# Altium PCB FOC_DRV8323.PcbDoc
Units mil, origin at the board's own origin, x right, y up, seen from the top; angles counter-clockwise.
Board outline 2322.83 x 1417.32 mil, 2 copper layers (Top Layer, Bottom Layer); 37 components, 36 nets, 170 pads, 338 vias.
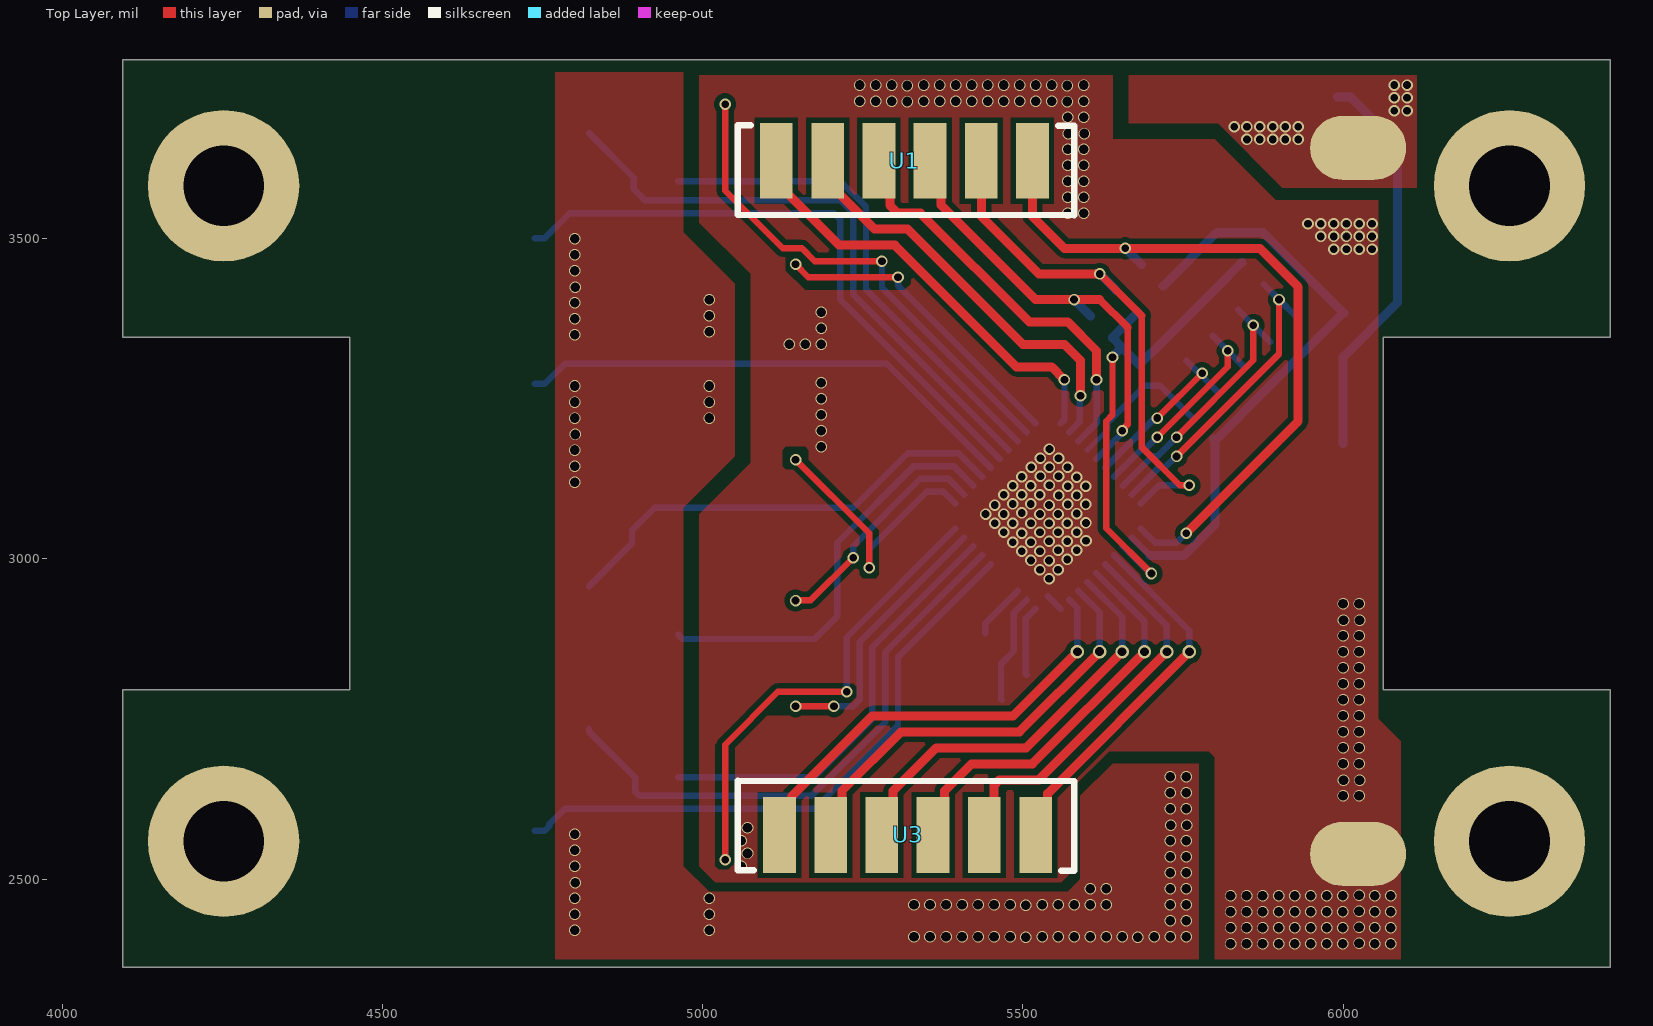
[diagram p0: Top Layer view]
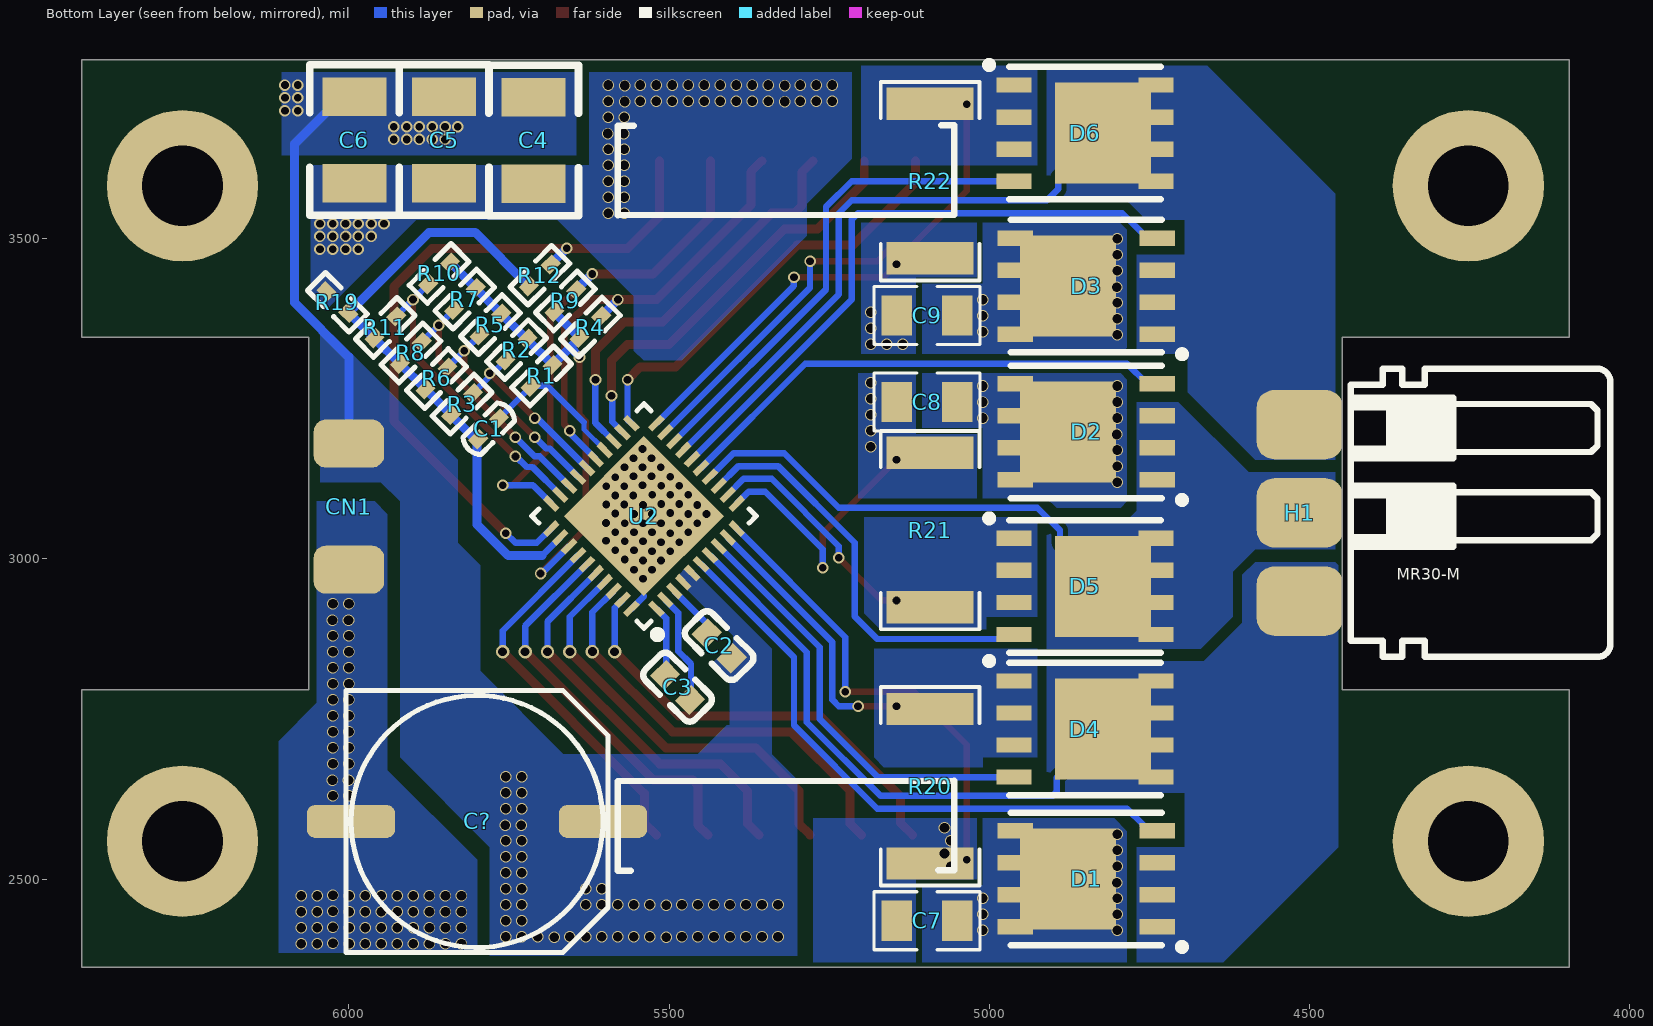
[diagram p1: Bottom Layer view, seen from below]
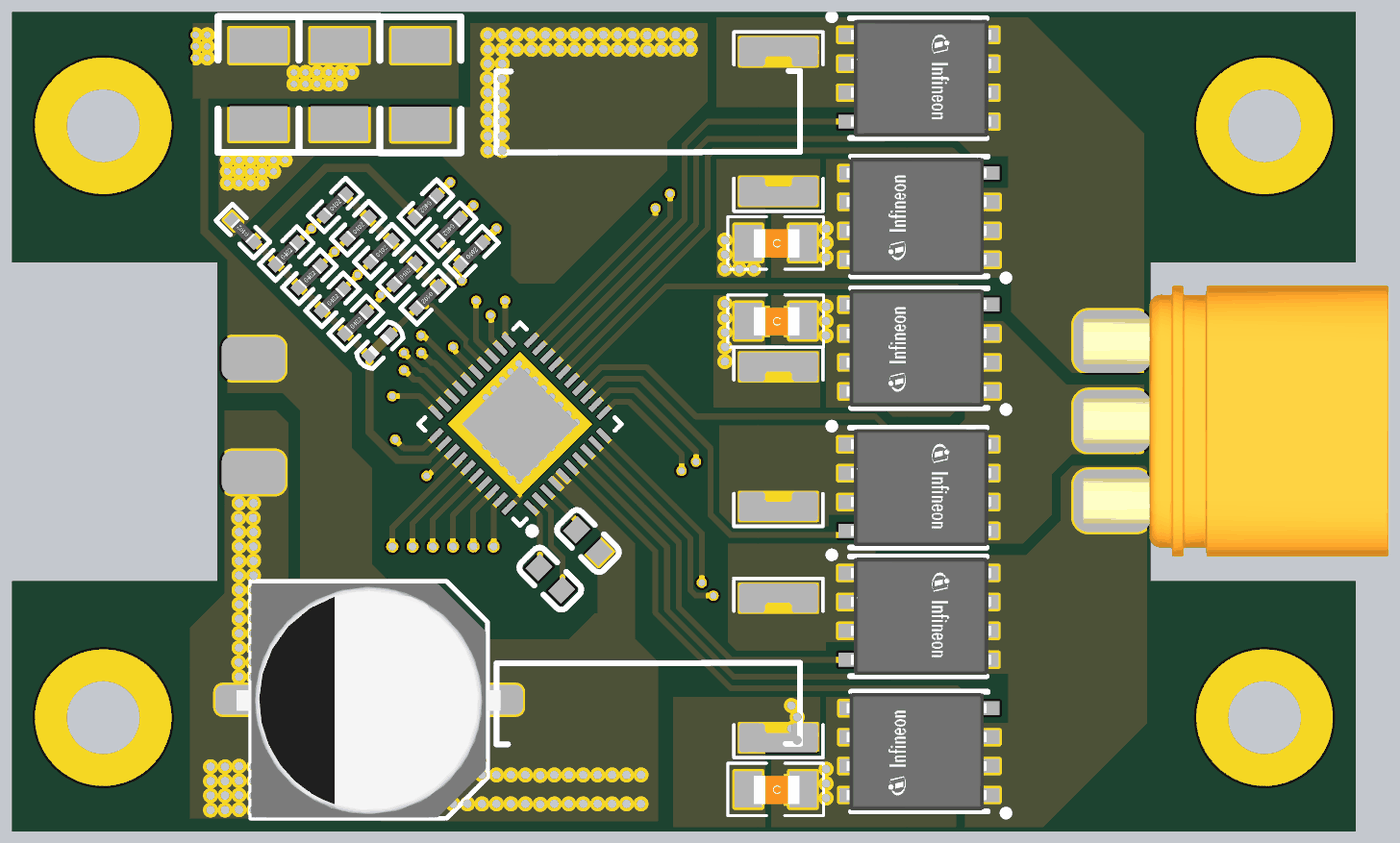
[diagram p2: 3D render of the assembled board from below, using the file's embedded part models]

## Layer stack, top to bottom
Top Solder: solder mask 0.4, Solder Resist, Dk 3.5
Top Layer: signal copper 1.4
Dielectric 1: dielectric 12.6, FR-4, Dk 4.8
Bottom Layer: signal copper 1.4
Bottom Solder: solder mask 0.4, Solder Resist, Dk 3.5

## Board outline
4094.49,2362.2 4094.49,2795.28 4448.82,2795.28 4448.82,3346.46 4094.49,3346.46 4094.49,3779.53 6417.32,3779.53 6417.32,3346.46 6062.99,3346.46 6062.99,2795.28 6417.32,2795.28 6417.32,2362.2

## Design rules (kind name [scope] priority, off if disabled: settings)
Clearance [All] p1: gap=6 ignorepadtopadclearanceinfootprint=FALSE except(0: Arc-Hole Track-Hole SMDPad-Hole THPad-Hole Via-Hole Fill-Hole Poly-Hole Region-Hole Text-Hole; 8: Arc-Fill Arc-Poly Arc-Region Track-Fill Track-Poly Track-Region SMDPad-Fill SMDPad-Poly SMDPad-Region THPad-Fill THPad-Poly THPad-Region Via-Fill Via-Poly Via-Region Fill-Fill Fill-Poly Fill-Region Poly-Poly Poly-Region Region-Region)
HoleToHoleClearance [All] p1: gap=4 allowstackedmicrovias=TRUE
MinimumSolderMaskSliver [All] p1: minsoldermaskwidth=0
PlaneClearance [All] p1: clearance=8
PlaneConnect [All] p1: planeconnectstyle=Direct reliefexpansion=20 reliefentries=4 reliefconductorwidth=10 reliefairgap=10
PolygonConnect [All] p1: connectstyle=Direct reliefconductorwidth=10 reliefentries=4 polygonreliefangle="90 Angle" airgapwidth=10
RoutingVias [All] p1: holewidth=12 width=18 viastyle="Through Hole" minholewidth=10 minwidth=18 maxholewidth=28 maxwidth=50
SilkToSilkClearance [All] p1: silktosilkclearance=0
SilkToSolderMaskClearance [IsPad] p1: minsilkscreentomaskgap=0 clearancetoexposedcopper=TRUE
SolderMaskExpansion [All] p1: expansion=4 istentingtop=FALSE
Width [All] p1: maxlimit=14 minlimit=6 preferedwidth=10
24 further rules are at their usual default settings.

## Components (designator, comment, footprint, x,y, rotation, side; value= is the part's Value field where it differs from the comment)
C1 "100nF" c0402 5766.21,3218.79 r315 bottom
C2 "1uF" C0603 5919.03,3237.21 r225 bottom
C3 "47nF" C0603 5984.03,3172.21 r225 bottom
C4 "10uF" 1210 5711.52,3586.09 r90 bottom
C5 "10uF" 1210 5851.44,3586.56 r90 bottom
C6 "10uF" 1210 5991.44,3586.56 r90 bottom
C7 "10uF" C0805 5097.24,2435 r180 bottom
C8 "10uF" C0805 5097.24,3245 r180 bottom
C9 "10uF" C0805 5097.24,3380 r180 bottom
C? "铝电解电容" C10X10 5800,2590 r0 bottom value=47uF
CN1 "XT30_1" XT30卧式焊盘 6000,3081.57 r0 bottom
D1 "NTMFS5C670" pg-tdson-8 4957.83,2450.34 r90 bottom
D2 "NTMFS5C670" pg-tdson-8 4957.83,3148.34 r90 bottom
D3 "NTMFS5C670" pg-tdson-8 4957.83,3376.01 r90 bottom
D4 "NTMFS5C670" pg-tdson-8 4741.46,2784.33 r270 bottom
D5 "NTMFS5C670" pg-tdson-8 4741.46,3007 r270 bottom
D6 "NTMFS5C670" pg-tdson-8 4741.46,3715 r270 bottom
H1 "MR30-M" MR30 4515,3071.89 r90 bottom
R1 "0" R0402 5682.13,3302.87 r315 bottom
R2 "0" R0402 5755.3,3309.7 r135 bottom
R3 "0" R0402 5840.3,3224.7 r135 bottom
R4 "200k" R0402 5640,3345 r135 bottom
R5 "0" R0402 5796.21,3348.79 r135 bottom
R6 "0" R0402 5880.3,3264.7 r135 bottom
R7 "0" R0402 5836.21,3388.79 r135 bottom
R8 "0" R0402 5920.3,3304.7 r135 bottom
R9 "0" R0402 5645,3420 r315 bottom
R10 "0" R0402 5876.21,3428.79 r135 bottom
R11 "0" R0402 5960.3,3344.7 r135 bottom
R12 "200k" R0402 5685,3460 r315 bottom
R19 "0" R0402 6001.21,3383.79 r45 bottom
R20 "0.004" R2512 5092.39,2645 r270 bottom
R21 "0.004" R2512 5092.39,3045 r90 bottom
R22 "0.004" R2512 5092.39,3590 r270 bottom
U1 "邮票孔6P加大" PCBComponent_1___pad 5317.48,3607.05 r90 top locked
U2 "DRV8323HRTAR" QFN-40_L6.0-W6.0-P0.50-BL-EP4.5 5531.21,3058.79 r135 bottom
U3 "邮票孔6P加大" PCBComponent_1___pad 5317.48,2583.43 r270 top locked

## Footprints (in the part's own frame and the unit in brackets; to place one, negate y for a bottom-side part, rotate by r counter-clockwise, add the part's x,y. Pads: shape width x height; smd on the part's side, far side on the other; paste and mask are expansions set on the pad)
1210 [mil]
  rect 60x100 smd: 1(0,0) 2(135,0)
  silkscreen extent -50,-70 185,70, body extent 4,-49 130,49, height 30
C10X10 [mm]
  rrect50% 3.5x1.3 smd: 1(-5,0) 2(5,0)
  silkscreen extent -5.2,-5.2 5.2,5.2, body extent -5.77,-5.12 5.83,5.18, height 10.21
c0402 [mil]
  rect 25x20 smd: 1(-1,0) 2(45,0)
  silkscreen extent -23,-19 67,20, body extent 2,-10 42,10, height 20
C0603 [mm]
  rect 0.8x0.9 smd: 1(14.929,2.234) 2(16.33,2.234)
  silkscreen extent 14.22,1.52 17.02,2.95, body extent 14.82,1.84 16.42,2.64, height 0.78
C0805 [mm]
  rect 1.2x1.6 smd: 1(-1.2,0) 2(1.2,0)
  silkscreen extent -2.1,-1.15 2.1,1.15, body extent -1.46,-0.72 1.54,0.68, height 0.93
MR30 [mm]
  rrect50% 2.75x3.429 smd: 1(3.5,0) 2(0,0) 3(-3.5,0)
  silkscreen extent -5.72,-12.31 5.72,-2.02, body extent -5.95,-12.12 5.95,1.28, height 2.45
PCBComponent_1___pad [mm]
  rect 3x1.3 smd paste+0 mask+0.102: 1(0.37,5.143) 2(0.37,3.103) 3(0.37,1.073) 4(0.37,-0.957) 5(0.37,-2.987) 6(0.37,-5.017)
  silkscreen extent -1.79,-6.67 1.79,6.67
pg-tdson-8 [mm]
  rect 0.61x1.4 smd: 1(3.175,-5.588) 2(-0.635,0.044) 2(0.635,0.044) 2(1.905,0.044) 2(3.175,0.044) 3(-0.635,-5.588) 3(0.635,-5.588) 3(1.905,-5.588)
  rect 4x3.81 smd: 2(1.27,-2.056)
  silkscreen extent -1.55,-6.7 3.9,0.23, body extent -1.43,-5.73 3.97,0.42, height 1.01
QFN-40_L6.0-W6.0-P0.50-BL-EP4.5 [mm]
  rect 0.25x0.7 smd paste-100 mask+0.051: 1(-2.25,-2.659) 2(-1.75,-2.659) 3(-1.25,-2.659) 4(-0.75,-2.659) 5(-0.25,-2.659) 6(0.25,-2.659) 7(0.75,-2.659) 8(1.25,-2.659) 9(1.75,-2.659) 10(2.25,-2.659) 21(2.25,3.241) 22(1.75,3.241) 23(1.25,3.241) 24(0.75,3.241) 25(0.25,3.241) 26(-0.25,3.241) 27(-0.75,3.241) 28(-1.25,3.241) 29(-1.75,3.241) 30(-2.25,3.241)
  rect 0.7x0.25 smd paste-100 mask+0.051: 11(2.95,-1.958) 12(2.95,-1.459) 13(2.95,-0.958) 14(2.95,-0.459) 15(2.95,0.042) 16(2.95,0.541) 17(2.95,1.042) 18(2.95,1.541) 19(2.95,2.041) 20(2.95,2.541) 31(-2.95,2.541) 32(-2.95,2.041) 33(-2.95,1.541) 34(-2.95,1.042) 35(-2.95,0.541) 36(-2.95,0.042) 37(-2.95,-0.459) 38(-2.95,-0.958) 39(-2.95,-1.459) 40(-2.95,-1.958)
  rect 4.5x4.5 smd paste-100 mask+0.051: 41(0,0.292)
  silkscreen extent -3.15,-3.56 3.15,3.44
R0402 [mil] "1/16W"
  rect 25x20 smd: 1(0,0) 2(48.2,0)
  silkscreen extent -22,-20 70,20, body extent 5,-10 44,10, height 14
R2512 [mil]
  rect 50.49x136.06 smd paste-3937.01 mask+2: 1(120.72,0) 2(-120.72,0)
  silkscreen extent -155,-77 155,77
XT30卧式焊盘 [mil]
  rrect50% 110x75 smd: 1(0,98.43) 2(0,-98.43)

## Part data
C1 C2 C3: library part CC0201JRX7R9BB101
C4 C5 C6 C7 C8 C9: library part 1210贴片电容, "1210贴片电容"
C?: library part "SMD 10x10 铝电解电容", "SMD 10x10 铝电解电容", LatestRevisionDate=29-May-2009, LatestRevisionNote="IPC-7351 Footprint Added.", PackageDescription="Chip Capacitor", PackageReference=C0805, Published=8-Jun-2000, Publisher="Altium Limited"
D1 D2 D3 D4 D5 D6: "N沟道MOS管", ComponentLink1Description="Manufacturer Link", ComponentLink1URL=http://www.irf.com/, DatasheetVersion=PD-9.814, LatestRevisionDate=17-Jul-2002, LatestRevisionNote="Re-released for DXP Platform.", Note="Pin 2 is electrically connected to pin 4.", PackageDescription="TO, Thru-Hole, Vertical, Heatsink Mounted; 3 In-Line Leads; Pitch 2.54 mm", PackageReference=TO-220AB, PackageVersion=Feb-1997, Published=8-Jun-2000, Publisher="Altium Limited"
H1: BOM_Manufacturer=AMASS(艾迈斯), BOM_Manufacturer Part=MR30-M, BOM_Supplier=LCSC, BOM_Supplier Part=C99873, Contributor=LCEDA_Lib, spicePre=H, spiceSymbolName=HDR-F-2.54_1x3
R1 R2 R3 R4 R5 R6 R7 R8 R9 R10 R11 R12 R19: library part 2.2R, BOM_Manufacturer=UniOhm, BOM_Manufacturer Part=0603WAJ022JT5E, BOM_Supplier=LCSC, BOM_Supplier Part=C25226, nameAlias=Value(Ω), spicePre=R, spiceSymbolName=Res_0603(1/10W)_EU
R20 R21 R22: library part 0.0005, BOM_Manufacturer=RALEC(旺诠), BOM_Manufacturer Part=LR2512-23R0005J4, BOM_Supplier=LCSC, BOM_Supplier Part=C2681067, Contributor=LCSC, nameAlias="Resistance (Ohms)", spicePre=R, spiceSymbolName=LCSR2512FL500K9L

## Free pads (board coordinates)
  oval 150x100 smd: 3(6023.62,2539.37) 3(6023.62,3641.73)
  round 236.22 hole 125.98: 4(4251.97,2559.06) 4(4251.97,3582.68) 4(6259.84,2559.06) 4(6259.84,3582.68)

## Via types
v1: diameter 18, hole 15, Top Layer to Bottom Layer, 211 vias
v2: diameter 18, hole 12, Top Layer to Bottom Layer, 121 vias
v3: diameter 21, hole 14, Top Layer to Bottom Layer, 6 vias

## Nets (pads, with @x,y where several pads share a name; then routed paths per layer and width w, separated by ;. In a path a pad name is that pad's centre, name@x,y a point inside that pad or via, vN(x,y) a via of type N, cw(c..) or ccw(c..) an arc to the next point about the centre after c; other vN are vias at no path point)
AGND: C1.2 R3.1 R6.1 R8.1 R11.1 R12.2 R19.1 U2.32 | length 949.7
  Bottom Layer w10: U2.32 5698.67,3005
  Bottom Layer w14: 5698.67,3005 5751.11,3005 5799.8,3053.69 5799.8,3185.2 C1.2 5798.17,3186.83 5802.42,3186.83 R6.1 R8.1 R11.1 5999.38,3383.79 R19.1 5875,3510 5803.16,3510 R12.2
CAL: R12.1 U1.6 U2.31 | length 1126.4
  Top Layer w14: U1.6 5514.99,3535.01 5565,3485 v2(5660,3485) 5870,3485 5930,3425 5930,3215 v2(5755,3040)
  Bottom Layer w10: U2.31 5706.5,3025 5740,3025 v2(5755,3040)
  Bottom Layer w14: v2(5660,3485) R12.1
DVDD: R1.1 R2.2 R4.1 R5.2 R7.2 R9.2 R10.2 U2.33 | length 796.9
  Top Layer w10: v2(5640,3315) 5640,3225 5630,3215 5630,3048.06 v2(5700.86,2977.2)
  Bottom Layer w10: U2.33 5656.36,3019.57 5698.73,2977.2 v2(5700.86,2977.2)
  Bottom Layer w14: v2@5640,3316.08 5654.46,3330.54 ; R9.2 5679.08,3385 5640,3345.92 R4.1 5654.46,3330.54 ; R10.2 R7.2 R5.2 5722.13,3342.87 R1.1 5654.46,3330.54
ENABLE: R9.1 U1.5 U2.30 | length 828.8
  Top Layer w10: 5685.38,3379.62 5685.38,3174.62 5745,3115 v2(5760,3115)
  Top Layer w12: v2(5620,3445) 5685.38,3379.62
  Top Layer w14: U1.5 5435.07,3534.93 5525,3445 v2(5620,3445)
  Bottom Layer w10: U2.30 5712.7,3115 v2(5760,3115)
  Bottom Layer w14: v2(5620,3445) R9.1
M0_AH: U2.34 U3.1 | length 585
  Top Layer w14: U3.1 5538.56,2587.45 5538.56,2633.56 v3(5760,2855)
  Bottom Layer w10: U2.34 5760,2887.99 v3(5760,2855)
M0_AL: U2.35 U3.2 | length 617.3
  Top Layer w14: U3.2 5455,2584.21 5455,2646.8 5463.2,2655 5525,2655 v3(5725,2855)
  Bottom Layer w10: U2.35 5725,2895.14 v3(5725,2855)
M0_BH: U2.36 U3.3 | length 632.7
  Top Layer w14: U3.3 5377.47,2586.6 5377.47,2637.47 5420,2680 5515,2680 v3(5690,2855)
  Bottom Layer w10: U2.36 5690,2902.31 v3(5690,2855)
M0_BL: U2.37 U3.4 | length 655.1
  Top Layer w14: U3.4 5297.38,2586.43 5297.38,2637.64 5364.74,2705 5505,2705 v3(5655,2855)
  Bottom Layer w10: U2.37 5655,2909.47 v3(5655,2855)
M0_CH: U2.38 U3.5 | length 677.1
  Top Layer w14: U3.5 5217.55,2586.52 5217.55,2637.55 5310,2730 5494.59,2730 v3(5619.8,2855.2)
  Bottom Layer w10: U2.38 5620,2916.63 5620,2855.41 v3(5619.8,2855.2)
M0_CL: U2.39 U3.6 | length 693.8
  Top Layer w14: U3.6 5138.56,2587.45 5138.56,2628.56 5265,2755 5485,2755 v3(5585,2855)
  Bottom Layer w10: U2.39 5572.73,2935.94 5585,2923.68 v3(5585,2855)
M0_GH_A: D1.1 U2.6 | length 949.1
  Bottom Layer w10: D1.1 4753.39,2575.34 4760.39,2582.34 4760.39,2585.39 4785,2610 5175,2610 5305,2740 5305,2846.49 U2.6
M0_GH_B: D2.1 U2.15 | length 793
  Bottom Layer w10: D2.1 4753.39,3273.34 4785.05,3305 5287.31,3305 U2.15
M0_GH_C: D3.1 U2.16 | length 974.7
  Bottom Layer w10: D3.1 4753.39,3501.01 4792.38,3540 5205,3540 5215,3530 5215,3405.14 U2.16
M0_GL_A: D4.1 U2.8 | length 675.9
  Bottom Layer w10: D4.1 5174.33,2659.33 5265,2750 5265,2862.17 U2.8
M0_GL_B: D5.1 U2.13 | length 655.8
  Bottom Layer w10: D5.1 4968.47,2874.99 5174.99,2874.99 5210,2910 5210,3025 5330,3145 5391.63,3145 U2.13
M0_GL_C: D6.1 U2.18 | length 774.4
  Bottom Layer w10: D6.1 5215,3590 5255,3550 5255,3420.82 U2.18
M0_SH_A: D1.3 D4.2 H1.3 U2.7 | length 891.9
  Bottom Layer w10: D4.2@4822.41,2734.33 4822.41,2730.59 4895,2658 4895,2635.86 4900.86,2630 5170,2630 5285,2745 5285,2854.34 U2.7
M0_SH_B: D2.3 D5.2 H1.2 U2.14 | length 727.3
  Bottom Layer w10: D5.2@4822.41,2957 4889.68,3024.27 4889.68,3044.68 4925,3080 5235,3080 5320,3165 5399.47,3165 U2.14
M0_SH_C: D3.3 D6.2 H1.1 U2.17 | length 945.3
  Bottom Layer w10: D6.2@4822.41,3665 4892.41,3595 4892.41,3577.59 4910,3560 5215,3560 5235,3540 5235,3412.99 U2.17
M0_SNA: C4.1 C5.1 C6.1 C7.1 C8.1 C9.1 C?.2 CN1.1 pad.3@6023.62,2539.37 R19.2 R20.1 R21.1 R22.1 U2.10 U2.11 U2.20 U2.40 U2.41 | length 1667.8
  Top Layer w10: v2(5035,2530) 5035,2710 5117.42,2792.42 v2(5225,2792.42) ; v2(5145,3155) 5260,3040 v2(5260,2985.96) ; v2(5145,3460) 5165,3440 v2(5305,3440)
  Bottom Layer w10: v2(5225,2792.42) 5225,2877.84 U2.10 ; v2(5260,2985.96) 5260,3015 5350,3105 5375.96,3105 U2.11 ; v2(5305,3440) 5305.22,3439.78 5305.22,3426.28 U2.20 ; 5539.33,2941.63 U2.40
  other v1: 5824.31,2399.26 5849.31,2399.26 5874.31,2399.26 5899.31,2399.26 5924.31,2399.26 5949.31,2399.26 5974.31,2399.26 5999.31,2399.26 6049.31,2399.26 6074.31,2399.26 6025,2400 5824.31,2424.26 5849.31,2424.26 5874.31,2424.26 5899.31,2424.26 5924.31,2424.26 5949.31,2424.26 5974.31,2424.26 5999.31,2424.26 6049.31,2424.26 6074.31,2424.26 6025,2425 5824.31,2449.26 5849.31,2449.26 5874.31,2449.26 5899.31,2449.26 5924.31,2449.26 5949.31,2449.26 5974.31,2449.26 5999.31,2449.26 6049.31,2449.26 6074.31,2449.26 6025,2450 5824.31,2474.26 5849.31,2474.26 5874.31,2474.26 5899.31,2474.26 5924.31,2474.26 5949.31,2474.26 5974.31,2474.26 5999.31,2474.26 6049.31,2474.26 6074.31,2474.26 6025,2475 5060,2520 5070,2540 5060,2560 5070,2580 6000,2630 6025,2630 6000.74,2654.31 6025.74,2654.31 6000,2680 6025,2680 6000,2705 6025,2705 6000,2730 6025,2730 6000,2755 6025,2755 6000,2780 6025,2780 6000,2805 6025,2805 6000,2830 6025,2830 6000,2855 6025,2855 6000,2880 6025,2880 6000.74,2904.31 6025.74,2904.31 6000,2930 6025,2930 5185,3175 5185,3200 5185,3225 5185,3250 5185,3275 5135,3335 5160,3335 5185,3335 5185,3360 5185,3385 5570,3540 5595,3540 5570,3565 5595,3565 5570,3590 5595,3590 5570,3615 5595,3615 5570,3640 5595,3640 5570.74,3664.31 5595.74,3664.31 5570,3690 5595,3690 5319.31,3714.26 5569.31,3714.26 5245,3715 5270,3715 5295,3715 5345,3715 5370,3715 5395,3715 5420,3715 5445,3715 5470,3715 5495,3715 5520,3715 5545,3715 5595,3715 5319.31,3739.26 5569.31,3739.26 5245,3740 5270,3740 5295,3740 5345,3740 5370,3740 5395,3740 5420,3740 5445,3740 5470,3740 5495,3740 5520,3740 5545,3740 5595,3740
  other v2: 5540.86,2969.14 5526.72,2983.28 5555,2983.28 5540.86,2997.43 5512.57,2997.57 5569.14,2999.14 5498.43,3011.72 5526.72,3011.72 5555,3013.28 5584.23,3013.44 5484.29,3025.86 5512.57,3025.86 5569.14,3027.43 5540.86,3027.57 5598.6,3028.16 5498.43,3040 5584.21,3041.46 5470,3041.72 5526.72,3041.72 5555,3041.72 5455.86,3055.86 5484.14,3055.86 5512.57,3055.86 5540.86,3055.86 5569.14,3055.86 5598.58,3056.18 5441.72,3070 5470,3070 5526.72,3070 5555,3070 5584.14,3070.86 5498.28,3071.72 5455.86,3084.14 5540.86,3084.14 5570,3085 5598.28,3085 5484.14,3085.86 5512.43,3085.86 5555.86,3099.14 5584.14,3099.14 5470,3100 5498.28,3100 5526.57,3100 5570,3113.28 5598.28,3113.28 5484.14,3114.14 5512.43,3114.14 5541.57,3115 5584.14,3127.43 5498.28,3128.28 5527.43,3129.14 5555.71,3129.14 5513.28,3143.28 5541.57,3143.28 5569.85,3143.28 5527.43,3157.43 5555.71,3157.43 5541.57,3171.57 5985.29,3483.62 6005.29,3483.62 6025.29,3483.62 6045.29,3483.62 5965.29,3503.62 5985.29,3503.62 6005.29,3503.62 6025.29,3503.62 6045.29,3503.62 5945.29,3523.62 5965.29,3523.62 5985.29,3523.62 6005.29,3523.62 6025.29,3523.62 6045.29,3523.62
M0_SOA: U1.3 U2.23 | length 645.9
  Top Layer w14: U1.3 5292.48,3604.36 5292.48,3552.52 5305,3540 5340,3540 5510,3370 5570,3370 5615,3325 v2(5615,3280)
  Bottom Layer w10: U2.23 5586.65,3183.93 5615.08,3212.36 v2@5615.08,3279.92
M0_SOB: U1.2 U2.22 | length 662.8
  Top Layer w14: U1.2 5195.31,3588.14 5268.45,3515 5320,3515 5500,3335 5565,3335 5590,3310 v2(5590,3255)
  Bottom Layer w10: U2.22 5572.73,3197.86 5589,3214.12 5589,3254 v2(5590,3255)
M0_SOC: U1.1 U2.21 | length 682
  Top Layer w14: U1.1 5114.99,3588.14 5213.14,3490 5300,3490 5490,3300 5545,3300 v2(5565,3280)
  Bottom Layer w10: U2.21 5564.97,3217.81 v2(5565,3280)
M0_SPA: D4.3 R20.2 U2.9 | length 425.4
  Top Layer w10: v2(5145,2770) v2(5205,2770)
  Bottom Layer w10: v2(5205,2770) 5235,2770 5245,2780 5245,2870.01 U2.9
M0_SPB: D5.3 R21.2 U2.12 | length 363.1
  Top Layer w10: v2(5145,2935) 5145.71,2935.71 5169,2935.71 v2(5235,3001.71)
  Bottom Layer w10: v2(5235,3001.71) 5235,3020 5340,3125 5383.79,3125 U2.12
M0_SPC: D6.3 R22.2 U2.19 | length 786.4
  Top Layer w10: v2(5035,3710) 5035,3575 5125,3485 5155,3485 5175,3465 v2(5280,3465)
  Bottom Layer w10: v2(5280,3465) 5280,3423.67 U2.19
NetC1_1: C1.1 R1.2 U2.24 | length 234
  Bottom Layer w8: U2.24 5633.19,3202.53 5633.19,3213.19
  Bottom Layer w10: 5633.19,3213.19 5690.55,3270.55 5714.45,3270.55 C1.1
NetC2_1: C2.1 U2.3 | length 87.3
  Bottom Layer w10: C2.1 5441.11,2883.89 5441.11,2899.09 U2.3
NetC3_1: C3.1 U2.1 | length 110.1
  Bottom Layer w10: C3.1 5504.82,2820.18 5504.82,2907.12 U2.1
NetC3_2: C3.2 U2.2 | length 173.4
  Bottom Layer w10: C3.2 5465.85,2781.2 5465.85,2835.85 5485.63,2855.63 5485.63,2915.65 5505.92,2935.94 U2.2
NetR2_1: R2.1 R3.2 U2.26 | length 287.8
  Top Layer w10: v2(5710,3220) v2(5780,3290)
  Bottom Layer w10: U2.26 5704.81,3218.47 5708.47,3218.47 v2(5710,3220) ; R2.1 5773.47,3291.53 5778.47,3291.53 5781.53,3288.47 5781.53,3283.47 R3.2
NetR5_1: R5.1 R6.2 U2.27 | length 344.6
  Top Layer w10: v2(5710,3190) 5820,3300 v2(5820,3325)
  Bottom Layer w10: U2.27 5642.44,3128.14 5686.64,3172.34 5691.85,3172.34 5709.5,3190 v2(5710,3190) ; R5.1 v2(5820,3325) R6.2
NetR7_1: R7.1 R8.2 U2.28 | length 410.6
  Top Layer w10: v2(5740,3190) 5860,3310 v2(5860,3365)
  Bottom Layer w10: U2.28 5656.36,3114.23 5702.13,3160 5710,3160 v2(5740,3190) ; R7.1 v2(5860,3365) R8.2
NetR10_1: R10.1 R11.2 U2.29 | length 476.5
  Top Layer w10: v2(5740,3160) 5900,3320 v2(5900,3405)
  Bottom Layer w10: U2.29 5713.34,3143.47 5722.59,3143.47 5739.12,3160 v2(5740,3160) ; R10.1 v2(5900,3405) R11.2
nFAULT: R4.2 U1.4 U2.25 | length 709
  Top Layer w10: v2(5655,3200) 5655,3201.36 5663.5,3209.86 5663.5,3361.5
  Top Layer w12: 5620,3405 5663.5,3361.5
  Top Layer w14: U1.4 5372.44,3604.32 5372.44,3552.56 5520,3405 v2(5580,3405) 5620,3405
  Bottom Layer w10: R4.2@5605.84,3379.08 R4.2 ; U2.25 5655,3196.49 v2(5655,3200)
  Bottom Layer w14: v2(5580,3405) R4.2
VCC: C2.2 C4.2 C5.2 C6.2 C7.2 C8.2 C9.2 C?.1 CN1.2 D1.2 D2.2 D3.2 pad.3@6023.62,3641.73 U2.4 U2.5 | length 627.2
  Bottom Layer w14: C6.2 6011.44,3721.56 6034.44,3698.56 6085,3648 6085,3400 6000,3315 CN1.2
  other v1: 5504.31,2409.26 5679.31,2409.26 5330,2410 5355,2410 5380,2410 5405,2410 5430,2410 5455,2410 5480,2410 5530,2410 5555,2410 5580,2410 5605,2410 5630,2410 5655,2410 5705,2410 5730,2410 5755,2410 4800,2420 5010,2420 5730,2435 5755,2435 4800,2445 5010,2445 5504.31,2459.26 5330,2460 5355,2460 5380,2460 5405,2460 5430,2460 5455,2460 5480,2460 5530,2460 5555,2460 5580,2460 5605,2460 5630,2460 5730,2460 5755,2460 4800,2470 5010,2470 5605,2485 5630,2485 5730,2485 5755,2485 4800.74,2494.31 5730,2510 5755,2510 4800,2520 5730,2535 5755,2535 4800,2545 5730,2560 5755,2560 4800,2570 5730.74,2584.31 5755.74,2584.31 5730,2610 5755,2610 5730,2635 5755,2635 5730,2660 5755,2660 4800,3120 4800,3145 4800,3170 4800.74,3194.31 4800,3220 5010,3220 4800,3245 5010,3245 4800,3270 5010,3270 4800,3350 5010,3355 4800,3375 5010,3380 4800,3400 5010,3405 4800.74,3424.31 4800,3450 4800,3475 4800,3500
  other v2: 5850,3655 5870,3655 5890,3655 5910,3655 5930,3655 5830,3675 5850,3675 5870,3675 5890,3675 5910,3675 5930,3675 6080,3700 6100,3700 6080,3720 6100,3720 6080,3740 6100,3740

## Polygon pours and split planes (outlines as drawn)
M0_SPC on Bottom Layer "NONET_L-01_P-001" (solid, pour order 11): 4925,3615 5200,3615 5200,3770 4925,3770
M0_SNA on Bottom Layer "NONET_L-01_P-001" (solid, pour order 20): 6040,3390 6060,3410 6060,3615 5625,3615 5625,3760 5215,3760 5215,3625 5285,3555 5285,3505 5480,3310 5540,3310 5555,3325 5555,3410 5675,3530 5895,3530 6035,3390
VCC on Bottom Layer "NONET_L-01_P-001" (solid, pour order 19): 6105,3630 5645,3630 5645,3760 6105,3760
M0_SNA on Bottom Layer "NONET_L-01_P-001" (solid, pour order 18): 5960,3090 5940,3070 5940,2670 5800,2530 5800,2385 6110,2385 6110,2715 6050,2775 6050,3090
VCC on Bottom Layer "NONET_L-01_P-001" (solid, pour order 7): 5105,3320 4795,3320 4785,3330 4785,3515 4795,3525 5010,3525 5010,3430 5105,3430
VCC on Bottom Layer "NONET_L-01_P-001" (solid, pour order 2): 5105,2370 4785,2370 4785,2575 4805,2595 5010,2595 5010,2490 5105,2490
VCC on Bottom Layer (solid, pour order 16): 5780,2380 5780,2550 5920,2690 5920,3090 5950,3120 6045,3120 6045,3350 6025,3350 5830,3155 5830,3025 5795,2990 5795,2825 5665,2695 5475,2695 5455,2695 5410,2740 5405,2740 5405,2805 5435,2835 5400,2870 5400,2880 5490,2970 5470,2990 5340,2860 5340,2695 5300,2655 5300,2380
M0_SH_C on Bottom Layer "NONET_L-01_P-001" (solid, pour order 10): 4910,3560 4910,3770 4660,3770 4460,3570 4460,3155 4585,3155 4690,3260 4690,3320 4770,3320 4770,3475 4695,3475 4695,3530 4755,3530 4785,3560
M0_SNA on Bottom Layer "NONET_L-01_P-001" (solid, pour order 9): 5200,3320 5115,3320 5115,3440 5020,3440 5020,3525 5200,3525
M0_SNA on Bottom Layer "NONET_L-01_P-001" (solid, pour order 8): 5020,3095 5020,3195 5115,3195 5115,3290 5205,3290 5205,3095
VCC on Bottom Layer "NONET_L-01_P-001" (solid, pour order 6): 5105,3290 4795,3290 4785,3280 4785,3090 4795,3080 4895,3080 4910,3095 5010,3095 5010,3205 5105,3205
M0_SPB on Bottom Layer "NONET_L-01_P-001" (solid, pour order 5): 5170,2890 5195,2915 5195,3065 4930,3065 4925,3060 4925,2910 5005,2910 5005,2890
M0_SH_B on Bottom Layer "NONET_L-01_P-001" (solid, pour order 4): 4910,2860 4670,2860 4620,2910 4620,2980 4585,3015 4460,3015 4460,3135 4595,3135 4705,3245 4770,3245 4770,3075 4780,3065 4910,3065
M0_SNA on Bottom Layer "NONET_L-01_P-001" (solid, pour order 3): 5115,2370 5275,2370 5275,2595 5020,2595 5020,2500 5115,2500
M0_SH_A on Bottom Layer "NONET_L-01_P-001" (solid, pour order 1): 4770,2370 4770,2550 4695,2550 4695,2635 4890,2635 4910,2655 4910,2840 4665,2840 4605,2900 4605,2975 4585,2995 4460,2995 4455,2990 4455,2550 4635,2370
M0_SPA on Bottom Layer "NONET_L-01_P-001" (solid, pour order 0): 4925,2690 5010,2690 5010,2675 5165,2675 5180,2690 5180,2860 4925,2860
M0_SNA on Top Layer "NONET_L-01_P-001" (solid, pour order 17): 6090,2375 6090,2715 6055,2750 6055,3560 5895,3560 5800,3655 5640,3655 5640,3755 4995,3755 4995,3525 5075,3445 5075,3150 4995,3070 4995,2520 5020,2495 5560,2495 5575,2510 5575,2640 5635,2700 5790,2700 5800,2690 5800,2375
VCC on Top Layer "NONET_L-01_P-001" (solid, pour order 13): 5905,3580 5805,3680 5665,3680 5665,3755 6115,3755 6115,3580
VCC on Top Layer "NONET_L-01_P-001" (solid, pour order 12): 4970,3760 4970,3510 5050,3430 5050,3160 4970,3080 4970,2520 5010,2480 5570,2480 5590,2500 5590,2630 5640,2680 5775,2680 5775,2375 4770,2375 4770,3760

## Other copper
Top Layer:
  pour cut-out: 5275,2975 5270,2970 5250,2970 5245,2975 5245,3040 5145,3140 5130,3140 5125,3145 5125,3170 5130,3175 5160,3175 5165,3170 5165,3155 5275,3045
  pour cut-out: 5295,3475 5325,3445 5325,3430 5315,3420 5160,3420 5130,3450 5130,3475
  pour cut-out: 5240,2800 5240,2785 5210.59,2755.59 5100.59,2755.59 5050,2705 5050,2525 5040,2515 5025,2515 5020,2520 5020,2710 5115,2805 5235,2805

## Silkscreen, mask and mechanical layers (free items; w line width, h text height)
Mechanical 1:
  lines w10: 4094.49,2362.2 6417.32,2362.2 6417.32,2637.8 6417.32,2795.28 6062.99,2795.28 6062.99,3346.46 6417.32,3346.46 6417.32,3779.53 4094.49,3779.53 4094.49,3346.46 4448.82,3346.46 4448.82,2795.28 4094.49,2795.28 4094.49,2401.57 4094.49,2362.2